# EAGLE board CT_schematic (EAGLE 7.6.0)

Size 100 x 80 mm. Coordinates in mm from the lower left corner, seen from the top.
Outline: 0,0 100,0 100,80 0,80 0,0
Copper layers (1*16): Top 0.035mm / dielectric 1.5mm / Bottom 0.035mm
Design rules "default": minimum track width 10mil, minimum drill 24mil, track to track 8mil, track to pad 8mil, pad to pad 8mil, via to via 8mil, smd to smd 8mil, copper to edge 40mil, drill to drill 8mil, minimum pad ring 10mil, minimum via ring 8mil, stop-mask expansion 4mil, vias tented up to drill 0mil, thermal gap 10mil

## Footprints (pad centres in the part's own frame; a part is rotated, then mirrored left to right if it is on the bottom)
C0603 = smd 0.8 x 0.8: 1 -0.762,0; 2 0.762,0
C0402 = smd 0.5 x 0.5: 1 -0.508,0; 2 0.508,0
C1210 = smd 1.2 x 2.5: 1 -1.524,0; 2 1.524,0
C1206 = smd 1.3 x 1.6: 1 -1.524,0; 2 1.524,0
L0603 = smd 0.8 x 0.8: 1 -0.762,0; 2 0.762,0
R0603 = smd 0.8 x 0.8: 1 -0.762,0; 2 0.762,0
TFBGA64 = smd 0.35 x 0.35: A1 -1.75,1.75; A2 -1.25,1.75; A3 -0.75,1.75; A4 -0.25,1.75; A5 0.25,1.75; A6 0.75,1.75; A7 1.25,1.75; A8 1.75,1.75; B1 -1.75,1.25; B2 -1.25,1.25; B3 -0.75,1.25; B4 -0.25,1.25; B5 0.25,1.25; B6 0.75,1.25; B7 1.25,1.25; B8 1.75,1.25; C1 -1.75,0.75; C2 -1.25,0.75; C3 -0.75,0.75; C4 -0.25,0.75; C5 0.25,0.75; C6 0.75,0.75; C7 1.25,0.75; C8 1.75,0.75; D1 -1.75,0.25; D2 -1.25,0.25; D3 -0.75,0.25; D4 -0.25,0.25; D5 0.25,0.25; D6 0.75,0.25; D7 1.25,0.25; D8 1.75,0.25; E1 -1.75,-0.25; E2 -1.25,-0.25; E3 -0.75,-0.25; E4 -0.25,-0.25; E5 0.25,-0.25; E6 0.75,-0.25; E7 1.25,-0.25; E8 1.75,-0.25; F1 -1.75,-0.75; F2 -1.25,-0.75; F3 -0.75,-0.75; F4 -0.25,-0.75; F5 0.25,-0.75; F6 0.75,-0.75; F7 1.25,-0.75; F8 1.75,-0.75; G1 -1.75,-1.25; G2 -1.25,-1.25; G3 -0.75,-1.25; G4 -0.25,-1.25; G5 0.25,-1.25; G6 0.75,-1.25; G7 1.25,-1.25; G8 1.75,-1.25; H1 -1.75,-1.75; H2 -1.25,-1.75; H3 -0.75,-1.75; H4 -0.25,-1.75; H5 0.25,-1.75; H6 0.75,-1.75; H7 1.25,-1.75; H8 1.75,-1.75
AT24C02D = smd 1.6 x 0.6: 1 -2.475,1.905 | smd 1.55 x 0.6: 2 -2.475,0.635; 3 -2.475,-0.635; 4 -2.475,-1.905; 5 2.475,-1.905; 6 2.475,-0.635; 7 2.475,0.635; 8 2.475,1.905
TSSOP20-I = smd 0.4 x 1.35: 1 -2.925,-2.875; 2 -2.275,-2.875; 3 -1.625,-2.875; 4 -0.975,-2.875; 5 -0.325,-2.875; 6 0.325,-2.875; 7 0.975,-2.875; 8 1.625,-2.875; 9 2.275,-2.875; 10 2.925,-2.875; 11 2.925,2.875; 12 2.275,2.875; 13 1.625,2.875; 14 0.975,2.875; 15 0.325,2.875; 16 -0.325,2.875; 17 -0.975,2.875; 18 -1.625,2.875; 19 -2.275,2.875; 20 -2.925,2.875
182-009-MALE = drill 1.194 pad 1.524 octagon: 1 -5.537,10.923; 2 -2.769,10.923; 3 0,10.923; 4 2.769,10.923; 5 5.537,10.923; 6 -4.153,8.08; 7 -1.384,8.08; 8 1.384,8.08; 9 4.153,8.08 | hole 3.048: -12.446,9.501; 12.446,9.501
FCI_10118193-0001LF = smd 0.4 x 1.35: 1 -1.3,2.675; 2 -0.65,2.675; 3 0,2.675; 4 0.65,2.675; 5 1.3,2.675 | smd 1.6 x 1.4: 6 -3.2,2.45; 7 3.2,2.45 | smd 1.9 x 1.9: 8 -1.2,0; 9 1.2,0 | hole 0.5: -3.3,0; 3.3,0
SOT143B = smd 1 x 0.7: 1 -0.75,-1 | smd 0.6 x 0.7: 2 0.95,-1; 3 0.95,1; 4 -0.95,1
ABS07-32.768KHZ-7-T = smd 1.1 x 2.4: 1 -2.5,0; 2 0,0
ABLS-25.000MHZ-B2F-T = smd 5.6 x 2.8: 1 -3.81,0; 2 5.69,0
SOIC-8_EP = smd 1.6 x 0.533: 1 -2.921,1.905; 2 -2.921,0.635; 3 -2.921,-0.635; 4 -2.921,-1.905; 5 2.921,-1.905; 6 2.921,-0.635; 7 2.921,0.635; 8 2.921,1.905 | smd 2.54 x 3.302: EPAD 0,0 | drill 0.406 pad 0.406: P$1 -0.508,0.635; P$2 0.381,0.635; P$3 -0.508,-0.635; P$4 0.381,-0.635
DFN8_2X3MC = smd 0.813 x 0.305: 1 -1.398,0.75; 2 -1.398,0.25; 3 -1.398,-0.25; 4 -1.398,-0.75; 5 1.398,-0.75; 6 1.398,-0.25; 7 1.398,0.25; 8 1.398,0.75 | smd 1.753 x 1.549: 9 0,0
JST-2-SMD = smd 1 x 4.6: 1 -1,-3.7; 2 1,-3.7 | smd 1.6 x 3.4: NC1 -3.4,1.5; NC2 3.4,1.5
SON-6 = smd 0.55 x 0.3: 1 -0.355,0.5 | smd 0.52 x 0.3: 2 -0.37,0; 3 -0.37,-0.5; 4 0.37,-0.5; 5 0.37,0; 6 0.37,0.5
SW_4-1437565-2 = smd 1.4 x 2.1: 1 -2.23,4.55; 2 -2.23,-4.55; 3 2.23,4.55; 4 2.23,-4.55
LGM67K-G1J2-24-Z = smd 0.8 x 1.4: A -2,0; C 0,0
NC7SZ125M5X = smd 1.3 x 0.7: 1 -1.3,0.95; 2 -1.3,0; 3 -1.3,-0.95; 4 1.3,-0.95; 5 1.3,0.95
DUMMY_PACKAGE_132 = drill 0.3: 1 0,-1; 2 1.5,-1; 3 3,-1

## Placement (x,y rotation side)
C1  1e-07  [C0603]  -53.34,59.69 0 top  (outside the outline)
C2  1e-07  [C0603]  -57.15,59.69 0 top  (outside the outline)
C3  1e-07  [C0603]  -60.96,59.69 0 top  (outside the outline)
C4  1e-07  [C0603]  -64.77,59.69 0 top  (outside the outline)
C5  4.7e-06  [C0603]  -49.53,59.69 0 top  (outside the outline)
C6  1e-08  [C0603]  -68.58,59.69 0 top  (outside the outline)
C7  1e-06  [C0603]  -15.24,64.77 0 top  (outside the outline)
C8  1e-07  [C0603]  -19.05,64.77 0 top  (outside the outline)
C9  1e-11  [C0402]  -53.34,64.77 0 top  (outside the outline)
C10  1e-11  [C0402]  -57.15,64.77 0 top  (outside the outline)
C11  1e-11  [C0402]  -60.96,64.77 0 top  (outside the outline)
C12  1e-11  [C0402]  -64.77,64.77 0 top  (outside the outline)
C13  1e-08  [C0402]  -68.58,64.77 0 top  (outside the outline)
C14  1e-07  [C0402]  -15.24,69.85 0 top  (outside the outline)
C15  1e-07  [C0402]  -19.05,69.85 0 top  (outside the outline)
C16  1e-07  [C0402]  -22.86,69.85 0 top  (outside the outline)
C17  1e-07  [C0402]  -26.67,69.85 0 top  (outside the outline)
C18  1e-07  [C0402]  -30.48,69.85 0 top  (outside the outline)
C19  1e-07  [C0402]  -34.29,69.85 0 top  (outside the outline)
C20  1e-05  [C1210]  -57.15,45.72 0 top  (outside the outline)
C21  1e-05  [C1210]  -63.5,45.72 0 top  (outside the outline)
C22  1e-05  [C1210]  -16.51,53.34 0 top  (outside the outline)
C23  1e-05  [C1210]  -22.86,53.34 0 top  (outside the outline)
C24  1e-07  [C0402]  -38.1,69.85 0 top  (outside the outline)
C25  1e-05  [C1206]  -29.21,53.34 0 top  (outside the outline)
C26  1e-05  [C1206]  -35.56,53.34 0 top  (outside the outline)
C27  1e-08  [C0402]  -41.91,69.85 0 top  (outside the outline)
F1  240.0  [L0603]  -22.86,64.77 0 top  (outside the outline)
R2  1000.0  [R0603]  -26.67,64.77 0 top  (outside the outline)
R4  4700.0  [R0603]  -30.48,64.77 0 top  (outside the outline)
R5  2200.0  [R0603]  -34.29,64.77 0 top  (outside the outline)
R6  2200.0  [R0603]  -38.1,64.77 0 top  (outside the outline)
R7  10000.0  [R0603]  -66.04,53.34 0 top  (outside the outline)
R8  10000.0  [R0603]  -15.24,59.69 0 top  (outside the outline)
R9  10000.0  [R0603]  -20.32,59.69 0 top  (outside the outline)
R10  10000.0  [R0603]  -25.4,59.69 0 top  (outside the outline)
R11  10000.0  [R0603]  -30.48,59.69 0 top  (outside the outline)
R12  4031.5447154472  [R0603]  -50.8,53.34 0 top  (outside the outline)
R13  2200.0  [R0603]  -41.91,64.77 0 top  (outside the outline)
R14  10000.0  [R0603]  -35.56,59.69 0 top  (outside the outline)
R15  10000.0  [R0603]  -40.64,59.69 0 top  (outside the outline)
R16  9100.0  [R0603]  -45.72,64.77 0 top  (outside the outline)
R17  680000.0  [R0603]  -55.88,53.34 0 top  (outside the outline)
R18  120000.0  [R0603]  -60.96,53.34 0 top  (outside the outline)
R19  2000.0  [R0603]  -49.53,64.77 0 top  (outside the outline)
R20  10000.0  [R0603]  -45.72,59.69 0 top  (outside the outline)
U1  STM32L052R8H6  [TFBGA64]  -54.61,26.67 0 top  (outside the outline)
U2  AT24C02D-SSHM-T  [AT24C02D]  -25.4,38.1 0 top  (outside the outline)
U3  SP3203ECY-L/TR  [TSSOP20-I]  -24.13,27.94 0 top  (outside the outline)
U4  182-009-113R531  [182-009-MALE]  -36.83,6.35 0 top  (outside the outline)
U5  10118193-0001LF  [FCI_10118193-0001LF]  -35.56,36.83 0 top  (outside the outline)
U6  prtr5v0u2ax  [SOT143B]  -54.61,69.85 0 top  (outside the outline)
U7  ABS07-32.768KHZ-7-T  [ABS07-32.768KHZ-7-T]  -27.94,46.99 0 top  (outside the outline)
U8  ABLS-25.000MHZ-B2F-T  [ABLS-25.000MHZ-B2F-T]  -54.61,38.1 0 top  (outside the outline)
U9  MIC5234YME  [SOIC-8_EP]  -36.83,45.72 0 top  (outside the outline)
U10  MCP73831T-2ACI/MC  [DFN8_2X3MC]  -15.24,73.66 0 top  (outside the outline)
U11  S2B-PH-SM4-TB(LF)(SN)  [JST-2-SMD]  -38.1,29.21 0 top  (outside the outline)
U12  TPS3895ADRYR  [SON-6]  -63.5,68.58 0 top  (outside the outline)
U13  4-1437565-2  [SW_4-1437565-2]  -67.31,6.35 0 top  (outside the outline)
U14  Q65110A2395  [LGM67K-G1J2-24-Z]  -45.72,45.72 0 top  (outside the outline)
U15  nc7sz125m5x  [NC7SZ125M5X]  -40.64,53.34 0 top  (outside the outline)
U16  Dummy  [DUMMY_PACKAGE_132]  -60.96,69.85 0 top  (outside the outline)

## Library data of the parts
C1-C27 F1 R2 R4-R20 U1-U16 = circuit_tree

## Nets
CLK_CRYSTAL_U1_A1: C9.1 U1.A1 U7.1
CLK_CRYSTAL_U1_B1: C10.1 U1.B1 U7.2
CLK_CRYSTAL_U1_C1: C11.1 U1.C1 U8.1
CLK_CRYSTAL_U1_D1: C12.1 U1.D1 U8.2
GND: C1.2 C2.2 C3.2 C4.2 C5.2 C6.2 C7.2 C8.2 C9.2 C10.2 C11.2 C12.2 C13.2 C14.2 C15.2 C18.2 C19.2 C20.2 C21.2 C22.2 C23.2 C24.2 C25.2 C26.2 C27.2 R2.2 R7.2 R8.2 R10.2 R11.2 R13.2 R16.2 R18.2 R19.2 U1.C2 U1.D4 U1.D5 U1.D6 U1.F1 U2.4 U3.18 U4.5 U5.5 U5.6 U5.7 U5.8 U5.9 U6.1 U9.7 U9.EPAD U10.6 U10.9 U11.2 U12.2 U14.C U15.1 U15.3 U16.1
INPUT_USBPOWER_5V: C25.1 R20.2 U5.1 U6.4 U10.1 U10.2
NET_U1_A3: R6.1 U1.A3 U2.5
NET_U1_B3: R5.1 U1.B3 U2.6
NET_U1_B4: R7.1 U1.B4
NET_U1_E1: R4.1 U1.E1 U15.4
NET_U1_H1: C6.1 C7.1 F1.1 U1.G1 U1.H1
NET_U1_H7: U14.A
NET_U1_H8: U13.3 U13.4
NET_U2_1: R9.1 U2.1
NET_U2_2: R10.1 U2.2
NET_U2_3: R11.1 U2.3
NET_U2_7: R8.1 U2.7
NET_U3_1: C16.1 U3.1
NET_U3_2: C18.1 U3.2
NET_U3_3: C16.2 U3.3
NET_U3_4: C17.1 U3.4
NET_U3_5: C17.2 U3.5
NET_U3_6: C19.1 U3.6
NET_U3_20: U3.20
NET_U4_2: U3.14 U4.2
NET_U4_3: U3.17 U4.3
NET_U4_7: U3.13 U4.7
NET_U4_8: U3.16 U4.8
NET_U9_4: R12.2 R13.1 U9.4
NET_U10_5: R20.1 U10.5
NET_U10_8: R19.1 U10.8
NET_U12_1: R15.1 R16.1 U12.1
NET_U12_3: R17.2 R18.1 U12.3
NET_U12_4: R14.1 U12.4 U15.2
NET_U13_1: R2.1 U13.1 U13.2
PROC_LPUART1_CTS: U1.G4 U3.8
PROC_LPUART1_RTS: U1.B5 U3.10
PROC_LPUART1_RX: U1.B6 U3.11
PROC_LPUART1_TX: U1.B7 U3.7
PROC_TIM2_CH1: U1.A6 U16.3
PROC_TIM2_CH3: U1.F3 U16.2
PROC_USB_DM: U1.C8 U5.2 U6.3
PROC_USB_DP: U1.B8 U5.3 U6.2
VCC_S1_3V7: C20.1 C21.1 C26.1 U9.5 U9.8 U10.3 U10.4 U11.1
VCC_TIER1_3V3: C1.1 C2.1 C3.1 C4.1 C5.1 C8.1 C13.1 C14.1 C15.1 C22.1 C23.1 C24.1 C27.1 F1.2 R4.2 R5.2 R6.2 R9.2 R12.1 R14.2 R15.2 R17.1 U1.B2 U1.D2 U1.E4 U1.E5 U1.E6 U2.8 U3.12 U3.19 U9.1 U12.6 U15.5

## Tracks (layer width: path | path; a pad name or v marks a point on that pad's centre or on a via)
CLK_CRYSTAL_U1_A1  (2 unrouted)
CLK_CRYSTAL_U1_B1  (2 unrouted)
CLK_CRYSTAL_U1_C1  (2 unrouted)
CLK_CRYSTAL_U1_D1  (2 unrouted)
GND  (57 unrouted)
INPUT_USBPOWER_5V  (5 unrouted)
NET_U1_A3  (2 unrouted)
NET_U1_B3  (2 unrouted)
NET_U1_B4  (1 unrouted)
NET_U1_E1  (2 unrouted)
NET_U1_H1  (4 unrouted)
NET_U1_H8  (1 unrouted)
NET_U2_1  (1 unrouted)
NET_U2_2  (1 unrouted)
NET_U2_3  (1 unrouted)
NET_U2_7  (1 unrouted)
NET_U3_1  (1 unrouted)
NET_U3_2  (1 unrouted)
NET_U3_3  (1 unrouted)
NET_U3_4  (1 unrouted)
NET_U3_5  (1 unrouted)
NET_U3_6  (1 unrouted)
NET_U4_2  (1 unrouted)
NET_U4_3  (1 unrouted)
NET_U4_7  (1 unrouted)
NET_U4_8  (1 unrouted)
NET_U9_4  (2 unrouted)
NET_U10_5  (1 unrouted)
NET_U10_8  (1 unrouted)
NET_U12_1  (2 unrouted)
NET_U12_3  (2 unrouted)
NET_U12_4  (2 unrouted)
NET_U13_1  (2 unrouted)
PROC_LPUART1_CTS  (1 unrouted)
PROC_LPUART1_RTS  (1 unrouted)
PROC_LPUART1_RX  (1 unrouted)
PROC_LPUART1_TX  (1 unrouted)
PROC_TIM2_CH1  (1 unrouted)
PROC_TIM2_CH3  (1 unrouted)
PROC_USB_DM  (2 unrouted)
PROC_USB_DP  (2 unrouted)
VCC_S1_3V7  (7 unrouted)
VCC_TIER1_3V3  (32 unrouted)